# Altium PCB QCW Bridge PCBA.PcbDoc
Units mm, origin at the board's own origin, x right, y up, seen from the top; angles counter-clockwise.
Board outline 100 x 90 mm, 2 copper layers (Top Layer, Bottom Layer), stack 1.571 mm thick; 45 components, 17 nets, 129 pads, 228 vias.
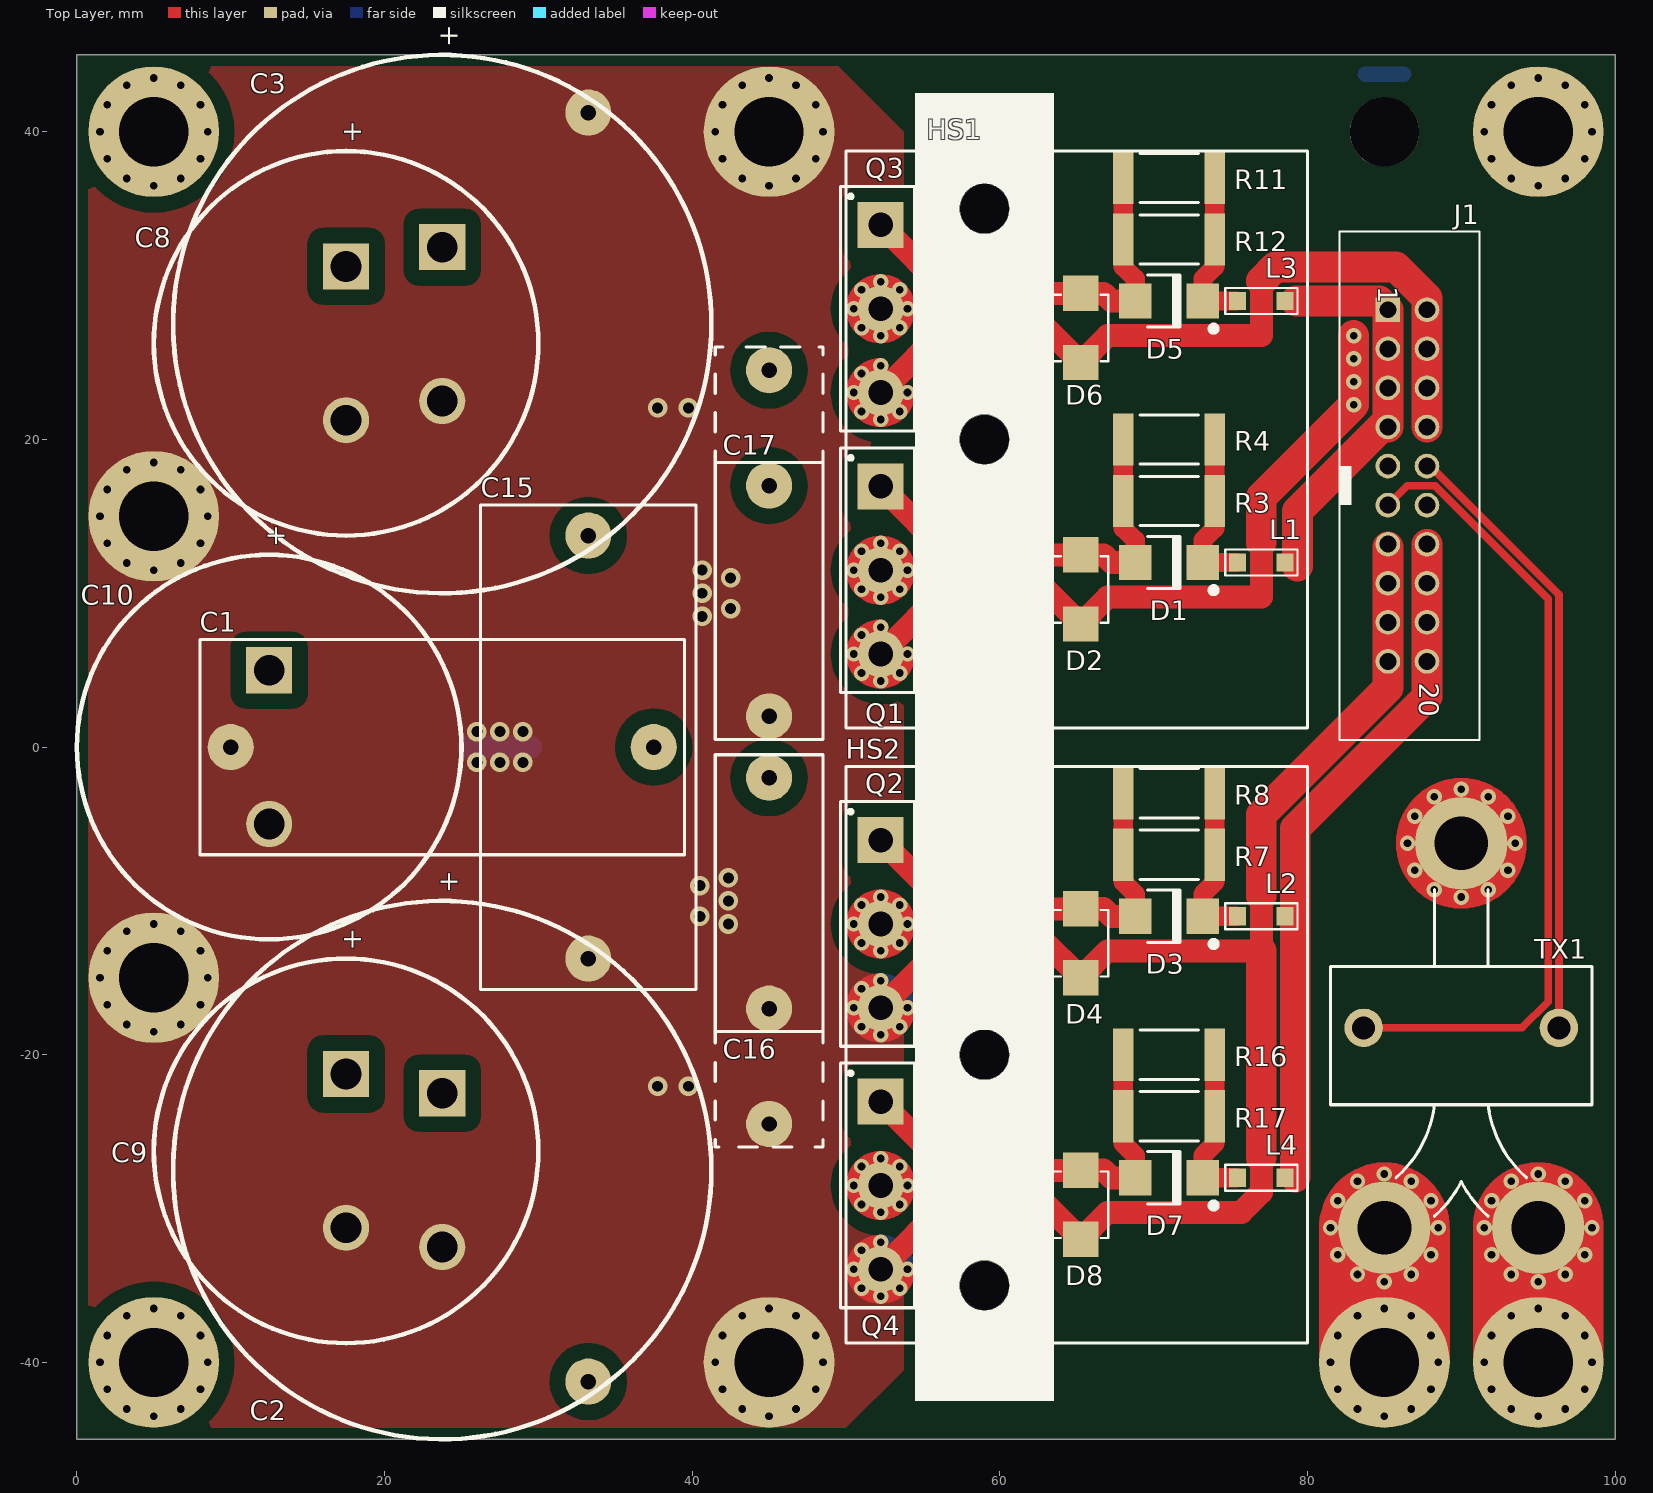
[diagram p0: Top Layer view]
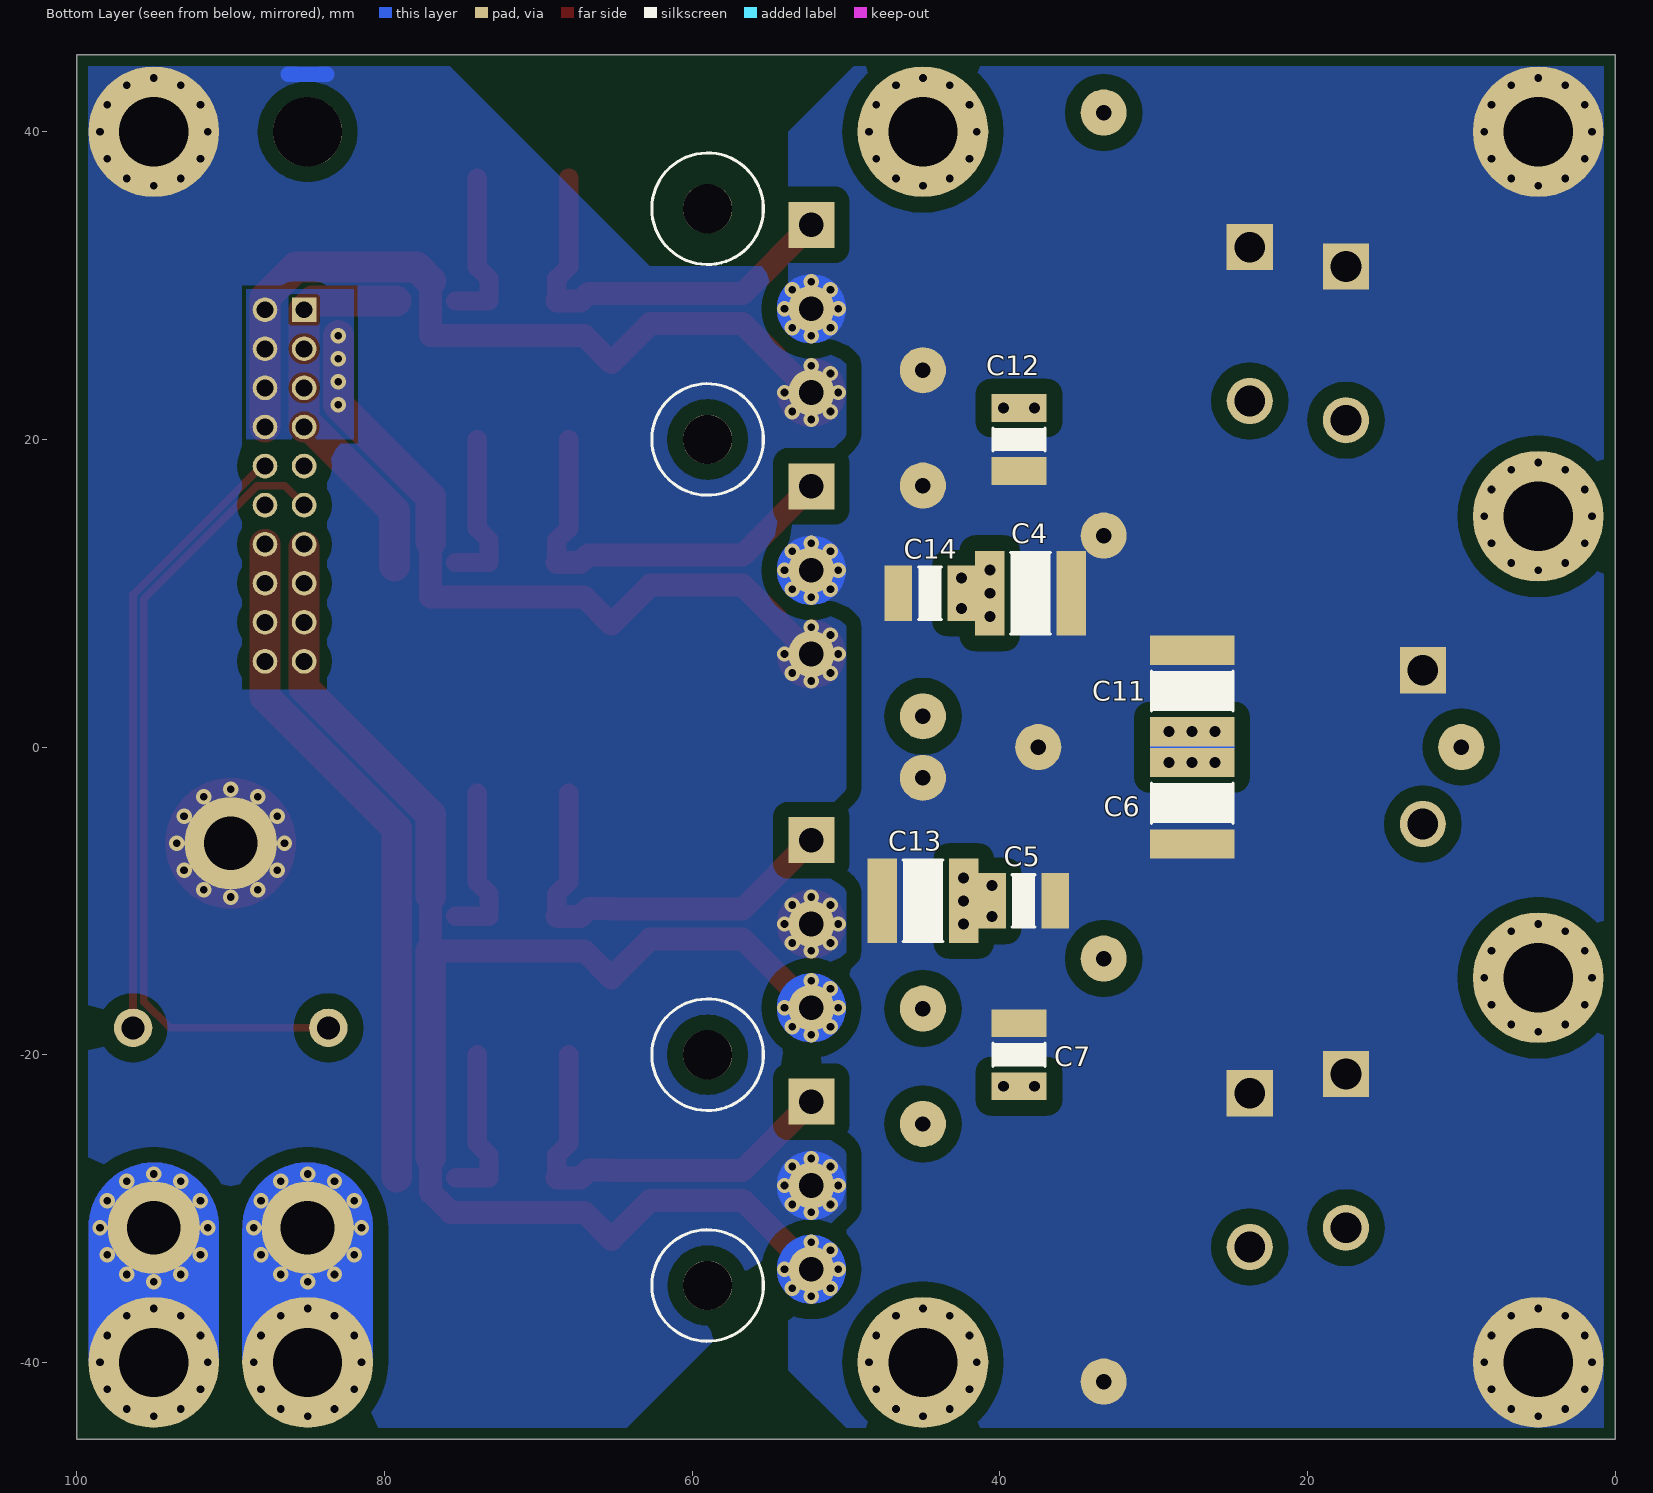
[diagram p1: Bottom Layer view, seen from below]

## Layer stack, top to bottom
Top Solder: solder mask 0.0102, Solder Resist, Dk 3.5
Top Layer: signal copper 0.0356
Dielectric 1: dielectric 1.5, FR-4, Dk 4.8
Bottom Layer: signal copper 0.0356
Bottom Solder: solder mask 0.0102, Solder Resist, Dk 3.5

## Board outline
0,-45 100,-45 100,45 0,45

## Design rules (kind name [scope] priority, off if disabled: settings)
Clearance Clearance_poly [InPolygon and not InNamedPolygon('E1C2_L02_P009')] p1: gap=1 ignorepadtopadclearanceinfootprint=FALSE
Clearance [All] p2: gap=0.203 ignorepadtopadclearanceinfootprint=FALSE
ComponentClearance [All] p1 off: gap=0.254 collisioncheckmode=3 verticalgap=0.254 showdistances=FALSE
Height [All] p1 off: minheight=0 maxheight=25.4 prefheight=12.7
HoleSize [All] p1: absolutevalues=TRUE maxlimit=6.3 minlimit=0.025 maxpercent=80.000 minpercent=20.000
PolygonConnect [All] p1: connectstyle=Direct reliefconductorwidth=0.254 reliefentries=4 polygonreliefangle="90 Angle" airgapwidth=0.254
RoutingVias [All] p1: holewidth=0.5 width=1 viastyle="Through Hole" minholewidth=0.5 minwidth=1 maxholewidth=0.5 maxwidth=1
SolderMaskExpansion [All] p1: expansion=0.102
Width [All] p1: maxlimit=10 minlimit=0.25 preferedwidth=0.5
27 further rules are at their usual default settings.

## Components (designator, comment, footprint, x,y, rotation, side; value= is the part's Value field where it differs from the comment)
C1 "B32774" "B32774 5uF 800V" 23.75,0 r180 top value="5uF 800V"
C2 "560uF" WCAP-AIL8_35x47 23.75,-27.5 r90 top locked
C3 "560uF" WCAP-AIL8_35x47 23.75,27.5 r90 top locked
C4 "Capacitor" 2220C 38,10 r0 bottom
C5 "Capacitor" 1812C 38.45,-10 r0 bottom
C6 "Capacitor" 2220C 27.5,-3.65 r90 bottom
C7 "Capacitor" 1812C 38.75,-20 r270 bottom
C8 "270uF" WCAP-AIL8_25x46 17.5,26.25 r90 top locked
C9 "270uF" WCAP-AIL8_25x46 17.5,-26.25 r90 top locked
C10 "270uF" WCAP-AIL8_25x46 12.5,0 r90 top locked
C11 "Capacitor" 2220C 27.5,3.65 r270 bottom
C12 "Capacitor" 1812C 38.75,20 r90 bottom
C13 "Capacitor" 2220C 45,-10 r180 bottom
C14 "Capacitor" 1812C 44.55,10 r180 bottom
C15 "B32774" "B32774 5uF 800V" 33.25,0 r270 top value="5uF 800V"
C16 "Capacitor" Cap_multi_footprint 45,-9.5 r270 top locked
C17 "Capacitor" Cap_multi_footprint 45,9.5 r90 top locked
D1 "60V 2A" DO-214AA_(SMB-J-BEND)_UNI 71,12 r180 top
D2 "600 W, 24 VDC" DO-214AA_Bidirectional 65.25,10.25 r270 top
D3 "60V 2A" DO-214AA_(SMB-J-BEND)_UNI 71,-11 r180 top
D4 "600 W, 24 VDC" DO-214AA_Bidirectional 65.25,-12.75 r270 top
D5 "60V 2A" DO-214AA_(SMB-J-BEND)_UNI 71,29 r180 top
D6 "600 W, 24 VDC" DO-214AA_Bidirectional 65.25,27.25 r270 top
D7 "60V 2A" DO-214AA_(SMB-J-BEND)_UNI 71,-28 r180 top
D8 "600 W, 24 VDC" DO-214AA_Bidirectional 65.25,-29.75 r270 top
HS1 "SK481_37.5mm HS" "SK 481 37.5" 55,20 r270 top locked
HS2 "SK481_37.5mm HS" "SK 481 37.5_FLIP" 55,-20 r270 top locked
J1 "61202021621" 61202021621 86.5,17 r270 top
L1 "32Ω" "WE-CBF_1206_High Speed" 77,12 r180 top value=32O
L2 "32Ω" "WE-CBF_1206_High Speed" 77,-11 r180 top value=32O
L3 "32Ω" "WE-CBF_1206_High Speed" 77,29 r180 top value=32O
L4 "32Ω" "WE-CBF_1206_High Speed" 77,-28 r180 top value=32O
Q1 "" TO-247 52.25,11.5 r270 top locked
Q2 "" TO-247 52.25,-11.5 r270 top locked
Q3 "" TO-247 52.25,28.5 r270 top locked
Q4 "" TO-247 52.25,-28.5 r270 top locked
R3 "Res2" RES_2512 71,16 r180 top value="5R6 1W"
R4 "Res2" RES_2512 71,20 r180 top value="5R6 1W"
R7 "Res2" RES_2512 71,-7 r180 top value="5R6 1W"
R8 "Res2" RES_2512 71,-3 r180 top value="5R6 1W"
R11 "Res2" RES_2512 71,37 r180 top value="5R6 1W"
R12 "Res2" RES_2512 71,33 r180 top value="5R6 1W"
R16 "Res2" RES_2512 71,-20 r180 top value="5R6 1W"
R17 "Res2" RES_2512 71,-24 r180 top value="5R6 1W"
TX1 "56050C 50:1 CT" KMP_5600_ALT 90,-18.75 r180 top locked

## Footprints (in the part's own frame and the unit in brackets; to place one, negate y for a bottom-side part, rotate by r counter-clockwise, add the part's x,y. Pads: shape width x height; smd on the part's side, far side on the other; paste and mask are expansions set on the pad)
1812C [mm] "Chip Capacitor, 2-Leads, Body 4.50x3.20mm, IPC Low Density"
  rect 1.8x3.6 smd: 1(-2.05,0) 2(2.05,0)
  silkscreen extent -0.75,-1.7 0.75,1.7, body extent -2.4,-1.75 2.4,1.75, height 2
2220C [mm] "Chip Capacitor, 2-Leads, Body 5.70x5.00mm, IPC Low Density"
  rect 1.9x5.5 smd: 1(-2.65,0) 2(2.65,0)
  silkscreen extent -1.3,-2.65 1.3,2.65, body extent -3.05,-2.7 3.05,2.7, height 2
61202021621 [mm] "20 pins, straight, gold plating"
  rect 1.6x1.6 hole 1.1: 1(-11.43,-1.27)
  round 1.6 hole 1.1: 2(-11.43,1.27) 3(-8.89,-1.27) 4(-8.89,1.27) 5(-6.35,-1.27) 6(-6.35,1.27) 7(-3.81,-1.27) 8(-3.81,1.27) 9(-1.27,-1.27) 10(-1.27,1.27) 11(1.27,-1.27) 12(1.27,1.27) 13(3.81,-1.27) 14(3.81,1.27) 15(6.35,-1.27) 16(6.35,1.27) 17(8.89,-1.27) 18(8.89,1.27) 19(11.43,-1.27) 20(11.43,1.27)
  silkscreen extent -16.53,-4.42 16.53,4.68, body extent -16.53,-4.42 16.53,4.75, height 9.13
"B32774 5uF 800V" [mm]
  round 3 hole 1: 1(-13.75,0) 2(13.75,0)
  silkscreen extent -15.75,-7 15.75,7, body extent -15.75,-7 15.75,7, height 24.5
Cap_multi_footprint [mm] "Multiple footprint capacitor"
  round 3 hole 1: 1(-7.5,0) 2(7.5,0) 2(15,0)
  silkscreen extent -9,-3.5 16.5,3.5, body extent -9,-2.5 9,2.5, height 10.5
DO-214AA_(SMB-J-BEND)_UNI [mm] "Surface Mount Diode"
  rect 2.1x2.3 smd: A(2.2,0) K(-2.2,0)
  silkscreen extent -3.04,-1.7 1.4,1.94, body extent -2.51,-1.97 2.52,1.97, height 2.44
DO-214AA_Bidirectional [mm] "WE-TVSP Power TVS Diode, DO-214AA, Bidirectional"
  rect 2.3x2.3 smd: 1(-2.25,0) 2(2.25,0)
  silkscreen extent -2.16,-1.81 2.16,1.81, body extent -2.7,-1.81 2.7,1.81, height 2.4
KMP_5600_ALT [mm] "Murata high frequency CT"
  round 2.5 hole 1.5: 1(-6.35,-0.5) 2(6.35,-0.5)
  round 6 hole 3.5: 3(5,12.5) 4(0,-12.5) 5(-5,12.5)
  silkscreen extent -8.5,-9.5 8.5,11.75, body extent -8.4,-4.47 8.4,4.45, height 20.23
RES_2512 [mm] "Chip Resistor 2512, 2-Leads, Body 6.40x3.20mm, IPC Medium Density"
  rect 1.35x3.4 smd: 1(-2.975,0) 2(2.975,0)
  silkscreen extent -1.9,-1.6 1.9,1.6, body extent -3.3,-1.7 3.3,1.7, height 0.7
"SK 481 37.5" [mm] "Fischer SK 481 Heatsink, 37.5mm wide"
  round 3.2 hole 3.2: 1(-15,4) 2(0,4)
  silkscreen extent -18.75,-5 18.75,25, body extent -18.75,-5 18.75,25, height 45.01
"SK 481 37.5_FLIP" [mm] "Fischer SK 481 Heatsink, 37.5mm wide"
  round 3.2 hole 3.2: 1(15,4) 2(0,4)
  silkscreen extent -18.75,-5 18.75,25, body extent -18.75,-5 18.75,25, height 45.01
TO-247 [mm] "SIP with Mounting Hole; 3 Leads; Body 20 x 15.6 x 5 mm (typ); Pitch 5.45 mm"
  rect 3x3 hole 1.6: 1(-5.45,0)
  round 3 hole 1.6: 2(0,0) 3(5.45,0)
  silkscreen extent -7.95,-2.6 7.95,2.7, body extent -8,-2.2 8,2.8, height 25.55
WCAP-AIL8_25x46 [mm] "Polarized capacitors, Aluminum Electrolytic Capacitors, 2-Leads, Body 25x46x10"
  rect 3x3 hole 2: 1(5,0)
  round 3 hole 2: 2(-5,0)
  silkscreen extent -12.5,-12.5 12.5,12.5, body extent -17.66,-17.64 17.59,17.62, height 46.09
WCAP-AIL8_35x47 [mm] "Polarized capacitors, Aluminum Electrolytic Capacitors, 2-Leads, Body 35x47x10"
  rect 3x3 hole 2: 1(5,0)
  round 3 hole 2: 2(-5,0)
  silkscreen extent -17.5,-17.5 17.5,17.5, body extent -24.73,-24.69 24.62,24.66, height 47.09
"WE-CBF_1206_High Speed" [mm] "SMD EMI Suppression Ferrite  Bead, body 3.2mmx1.6mm"
  rect 1.1x1.2 smd: 1(-1.55,0) 2(1.55,0)
  silkscreen extent -2.35,-0.85 2.35,0.85, body extent -1.6,-0.8 1.6,0.8, height 1.13

## Part data
C1 C15: library part Cap, "Capacitor", LatestRevisionDate=17-Jul-2002, LatestRevisionNote="Re-released for DXP Platform.", PackageDescription="Radial Cap, Thru-Hole; 2 Leads; 0.3 in Pin Spacing", PackageReference=RAD-0.3, Published=8-Jun-2000, Publisher="Altium Limited"
C2 C3: library part "WCAP-AIL8, 861101486027", "WCAP-AIL8 Aluminum Electrolytic Capacitors, 560uF", PartNumber=861101486027, RatedVoltage=450V, ComponentLink1Description=Manufacturer, ComponentLink1URL=http://www.we-online.de, ComponentLink2Description=Datasheet, ComponentLink2URL=http://katalog.we-online.com/pbs/datasheet/861101486027.pdf, PublishedDate="July 2016", Publisher="Wurth Elektronik", Size=35mmx47mm
C4 C6 C11 C13: Capacitance=0.22u, package=2220, voltage=630V
C5 C7 C12 C14: Capacitance=0.1u, package=1812, voltage=1kV
C8 C9 C10: library part "WCAP-AIL8, 861101484015", "WCAP-AIL8 Aluminum Electrolytic Capacitors, 270uF", PartNumber=861101484015, RatedVoltage=450V, ComponentLink1Description=Manufacturer, ComponentLink1URL=http://www.we-online.de, ComponentLink2Description=Datasheet, ComponentLink2URL=http://katalog.we-online.com/pbs/datasheet/861101484015.pdf, PublishedDate="July 2016", Publisher="Wurth Elektronik", Size=25mmx46mm
C16 C17: Capacitance=0.1u, voltage=630V
D1 D3 D5 D7: library part SS26, "SS26 Schottky rectifier"
D2 D4 D6 D8: library part "WE-TVSP DO-214AA, 824521241", "WE-TVSP Power TVS Diode, bidirectional, 600 W, 24 VDC", Manufacturer="Wurth Elektronik", partNo=824521241, ComponentLink1Description=Manufacturer, ComponentLink1URL=http://www.we-online.de, ComponentLink2Description=Datasheet, ComponentLink2URL=http://katalog.we-online.de/pbs/datasheet/824521241.pdf, Created by="Baojun Chen", Created Date=Nov.2015
HS1 HS2: library part SK_481_37.5
J1: "WR-BHD 2.54mm Male Box Header", Manufacturer="Wurth Elektronik", ComponentLink1 Description=Manufacturer, ComponentLink1URL=http://www.we-online.com, ComponentLink2 Description=Datasheet, ComponentLink2URL=http://katalog.we-online.de/em/datasheet/6120xx21621.pdf, Created by="Baojun Chen", Created Date="March 2016", NoPins=20, partNo=61202021621
L1 L2 L3 L4: library part "WE-CBF, 7427921", "WE-CBF SMD EMI Suppression Ferrite Bead, 1206, 32O", PartNumber=7427921, ComponentLink1Description=Manufacturer, ComponentLink1URL=http://www.we-online.de, ComponentLink2Description=Datasheet, ComponentLink2URL=http://katalog.we-online.de/pbs/datasheet/7427921.pdf, PublishedDate="Aug 2016", Publisher="Wurth Elektronik", Size=1206, Type="High Speed"
Q1 Q2 Q3 Q4: library part TO-247_IGBT_V, "IGBT, TO-247, Vertical"
R3 R4 R7 R8 R11 R12 R16 R17: "Resistor", LatestRevisionDate=17-Jul-2002, LatestRevisionNote="Re-released for DXP Platform.", PackageDescription="Axial Device, Thru-Hole; 2 Leads; 0.4 in Pin Spacing", PackageReference=AXIAL-0.4, Published=8-Jun-2000, Publisher="Altium Limited"
TX1: library part 56050C_ALT, "Murata 56050C 10A 50:1 CT"

## Free pads (board coordinates)
  round 8.5 hole 4.5: 0(5,-40) 0(5,-15) 0(5,15) 0(5,40) 0(45,-40) 0(45,40) 0(85,-40) 0(95,-40) 0(95,40)
  round 3 hole 1: 0(33.25,41.25) 0(33.25,-41.25)
  round 4.5 hole 4.5: 0(85,40)

## Via types
v1: diameter 1, hole 0.5, Top Layer to Bottom Layer, tented both sides, 112 vias
v2: diameter 1, hole 0.5, Top Layer to Bottom Layer, 96 vias
v3: diameter 1.27, hole 0.711, Top Layer to Bottom Layer, tented top, 20 vias

## Nets (pads, with @x,y where several pads share a name; then routed paths per layer and width w, separated by ;. In a path a pad name is that pad's centre, name@x,y a point inside that pad or via, vN(x,y) a via of type N, cw(c..) or ccw(c..) an arc to the next point about the centre after c; other vN are vias at no path point)
E1C2: D2.2 D6.2 J1.2 J1.4 J1.6 J1.8 pad.0@95,40 Q1.3 Q2.2 Q3.3 Q4.2 TX1.4 | length 183.5
  Top Layer w1: Q1.3@51.75,5.25 Q1.3@52.55,6.05 ; v1(52.25,7.8) ccw(c52.25,6.05) v1(51.013,4.813) ccw(c52.25,6.05) v1(54,6.05) ; v1(52.25,24.8) ccw(c52.25,23.05) v1(51.013,21.813) ccw(c52.25,23.05) v1(54,23.05) ; v1(50.5,-11.5) ccw(c52.25,-11.5) v1(54,-11.5) ccw(c52.25,-11.5) v1(50.5,-11.5) ; v1(54,-28.5) ccw(c52.25,-28.5) v1(54,-28.5)
  Top Layer w1.5: Q1.3 56.725,10.525 62.725,10.525 D2.2 67,9.75 77,9.75 77,13.302 ; Q3.3 56.725,27.525 62.725,27.525 D6.2 67,26.75 77,26.75 77,30.302 ; v1(93.5,-6.25) ccw(c90,-6.25) v1(93.5,-6.25)
  Top Layer w2: 77,13.302 77,16.25 v1(83,22.25) v1(83,23.75) v1(83,25.25) v1(83,26.75) ; 77,30.302 77.902,31.203 85.758,31.203 87.77,29.192 J1.2 J1.4 J1.6 J1.8
  Bottom Layer w1: v1(53.487,-29.737) cw(c52.25,-28.5) v1(53.487,-27.263) ; 83.75,43.75 86.25,43.75 ; J1.2@87.77,28.376 J1.2 ; v1(54,-28.5) ccw(c52.25,-28.5) v1(54,-28.5)
  other v1: 52.25,-30.25 51.013,-29.737 50.5,-28.5 51.013,-27.263 52.25,-26.75 52.25,-13.25 51.013,-12.737 53.487,-12.737 51.013,-10.263 53.487,-10.263 52.25,-9.75 90,-9.75 88.25,-9.281 91.75,-9.281 86.969,-8 93.031,-8 86.5,-6.25 86.969,-4.5 93.031,-4.5 88.25,-3.219 91.75,-3.219 90,-2.75 52.25,4.3 53.487,4.813 50.5,6.05 51.013,7.287 52.25,21.3 53.487,21.813 50.5,23.05 51.013,24.287
  other v2: 95,36.5 93.25,36.969 96.75,36.969 91.969,38.25 98.031,38.25 91.5,40 98.5,40 91.969,41.75 98.031,41.75 93.25,43.031 96.75,43.031 95,43.5
E1C2_OUT_1: pad.0@85,-40 TX1.3 | length 44
  Top Layer w1.5: v1@86.941,-34.162 ccw(c85,-31.25) v1(88.5,-31.25) ccw(c85,-31.25) v1@86.941,-34.162
  Bottom Layer w1.5: v1@86.941,-34.162 ccw(c85,-31.25) v1(88.5,-31.25) ccw(c85,-31.25) v1@86.941,-34.162
  other v1: 85,-34.75 83.25,-34.281 86.75,-34.281 81.969,-33 88.031,-33 81.5,-31.25 81.969,-29.5 88.031,-29.5 83.25,-28.219 86.75,-28.219 85,-27.75
  other v2: 85,-43.5 83.25,-43.031 86.75,-43.031 81.969,-41.75 88.031,-41.75 81.5,-40 88.5,-40 81.969,-38.25 88.031,-38.25 83.25,-36.969 86.75,-36.969 85,-36.5
E1C2_OUT_2: pad.0@95,-40 TX1.5 | length 44
  Top Layer w1.5: v1@96.941,-34.162 ccw(c95,-31.25) v1(98.5,-31.25) ccw(c95,-31.25) v1@96.941,-34.162
  Bottom Layer w1.5: v1@96.941,-34.162 ccw(c95,-31.25) v1(98.5,-31.25) ccw(c95,-31.25) v1@96.941,-34.162
  other v1: 95,-34.75 93.25,-34.281 96.75,-34.281 91.969,-33 98.031,-33 91.5,-31.25 91.969,-29.5 98.031,-29.5 93.25,-28.219 96.75,-28.219 95,-27.75
  other v2: 95,-43.5 93.25,-43.031 96.75,-43.031 91.969,-41.75 98.031,-41.75 91.5,-40 98.5,-40 91.969,-38.25 98.031,-38.25 93.25,-36.969 96.75,-36.969 95,-36.5
HIGH_G: J1.1 J1.3 J1.5 J1.7 L1.1 L3.1 | length 25.8
  Top Layer w2: 79.25,29 84.66,29 J1.1 J1.3 J1.5 J1.7@85.23,21.23 ; 79.35,11.75 79.35,15.35 J1.7@85.23,21.23 ; J1.7 J1.7@85.23,21.23
LOW_G: J1.14 J1.16 J1.18 J1.20 L2.1 L4.1 | length 44.7
  Top Layer w2: 79.203,-27.953 79.203,-5.297 87.77,3.27 J1.20 J1.18 J1.16 J1.14
NetD1_A: D1.A D2.1 Q1.1 R3.2 R4.2 | length 26.9
  Top Layer w1.25: R4.2 R3.2 68.025,14.225 68.8,13.45 D1.A
  Top Layer w1.5: Q1.1 56.725,12.475 D2.1@65.225,12.475 ; D2.1 66.75,12.5 67.25,12 D1.A
NetD1_K: D1.K L1.2 R3.1 R4.1 | length 10.5
  Top Layer w1.25: R4.1 R3.1 73.975,14.225 73.2,13.45 D1.K L1.2@75.375,12
NetD3_A: D3.A D4.1 Q2.1 R7.2 R8.2 | length 26.9
  Top Layer w1: Q2.1 Q2.1@52.3,-6.1
  Top Layer w1.25: R8.2 68.025,-8.775 68.8,-9.55 D3.A
  Top Layer w1.5: Q2.1@52.3,-6.1 56.725,-10.525 D4.1@65.225,-10.525 ; D4.1 66.75,-10.5 67.25,-11 D3.A
NetD3_K: D3.K L2.2 R7.1 R8.1 | length 10.5
  Top Layer w1.25: R8.1 73.975,-8.775 73.2,-9.55 D3.K L2.2@75.375,-11
NetD5_A: D5.A D6.1 Q3.1 R11.2 R12.2 | length 26.9
  Top Layer w1.25: R11.2 68.025,31.225 68.8,30.45 D5.A
  Top Layer w1.5: Q3.1 56.725,29.475 65.225,29.475 D6.1 66.75,29.5 67.25,29 D5.A
NetD5_K: D5.K L3.2 R11.1 R12.1 | length 10.5
  Top Layer w1.25: R11.1 73.975,31.225 73.2,30.45 D5.K L3.2@75.375,29
NetD7_A: D7.A D8.1 Q4.1 R16.2 R17.2 | length 26.9
  Top Layer w1.25: R16.2 68.025,-25.775 68.8,-26.55 D7.A
  Top Layer w1.5: Q4.1 56.725,-27.525 D8.1@65.225,-27.525 ; D8.1 66.75,-27.5 67.25,-28 D7.A
NetD7_K: D7.K L4.2 R16.1 R17.1 | length 10.5
  Top Layer w1.25: R16.1 73.975,-25.775 73.2,-26.55 D7.K L4.2@75.375,-28
NetJ1_10: J1.10 TX1.1 | length 40.2
  Top Layer w0.5: J1.10 87.997,18.27 96.35,9.917 TX1.1
NetJ1_11: J1.11 TX1.2 | length 52.7
  Top Layer w0.5: TX1.2@83.9,-18.5 84.15,-18.25 93.941,-18.25 95.647,-16.545 95.647,9.625 88.289,16.983 86.483,16.983 J1.11
VBus+: C1.1 C2.1 C3.1 C4.1 C5.1 C6.1 C7.1 C8.1 C9.1 C10.1 C11.1 C12.1 C13.1 C14.1 C15.1 C16.1 C17.2 pad.0@5,40 pad.0@5,-40 pad.0@33.25,-41.25 Q1.2 Q3.2 | length 52.2
  Top Layer w1: v1(53.487,27.263) cw(c52.25,28.5) v1(53.487,29.737) ; v1(54,11.5) ccw(c52.25,11.5) v1(54,11.5) ; v1(54,28.5) ccw(c52.25,28.5) v1(54,28.5)
  Bottom Layer w1: v1(54,11.5) ccw(c52.25,11.5) v1(54,11.5) ; v1(54,28.5) ccw(c52.25,28.5) v1(54,28.5)
  other v1: 5,-43.5 3.25,-43.031 6.75,-43.031 1.969,-41.75 8.031,-41.75 1.5,-40 8.5,-40 1.969,-38.25 8.031,-38.25 3.25,-36.969 6.75,-36.969 5,-36.5 52.25,9.75 51.013,10.263 53.487,10.263 50.5,11.5 51.013,12.737 53.487,12.737 52.25,13.25 52.25,26.75 51.013,27.263 50.5,28.5 51.013,29.737 52.25,30.25
  other v2: 5,36.5 3.25,36.969 6.75,36.969 1.969,38.25 8.031,38.25 1.5,40 8.5,40 1.969,41.75 8.031,41.75 3.25,43.031 6.75,43.031 5,43.5
VBus-: C1.2 C2.2 C3.2 C4.2 C5.2 C6.2 C7.2 C8.2 C9.2 C10.2 C11.2 C12.2 C13.2 C14.2 C15.2 C16.2 C17.1 D4.2 D8.2 J1.13 J1.15 J1.17 J1.19 pad.0@5,15 pad.0@5,-15 pad.0@33.25,41.25 pad.0@45,40 pad.0@45,-40 Q2.3 Q4.3 | length 161.6
  Top Layer w1: v1(52.25,-32.2) ccw(c52.25,-33.95) v1(54,-33.95) ; v1(52.25,-15.2) ccw(c52.25,-16.95) v1(54,-16.95)
  Top Layer w1.5: Q4.3 56.725,-29.475 62.725,-29.475 D8.2 67,-30.25 75.698,-30.25 77,-28.948 77,-26.698 ; Q2.3 56.725,-12.475 62.725,-12.475 D4.2 67,-13.25 77,-13.25 77,-9.698
  Top Layer w2: 77,-26.698 77,-13.25 ; 77,-9.698 77,-4.384 85.23,3.846 J1.19 J1.17 J1.15 J1.13@85.23,13
  Bottom Layer w1: v1(51.013,-35.187) ccw(c52.25,-33.95) v1(51.013,-32.713) ; v1(51.013,-18.187) ccw(c52.25,-16.95) v1(51.013,-15.713) ; v1(54,-33.95) ccw(c52.25,-33.95) v1(54,-33.95) ; v1(54,-16.95) ccw(c52.25,-16.95) v1(54,-16.95)
  Bottom Layer w1.5: 25.5,0 29.5,0
  other v1: 52.25,-35.7 53.487,-35.187 50.5,-33.95 52.25,-18.7 53.487,-18.187 50.5,-16.95
  other v2: 45,-43.5 43.25,-43.031 46.75,-43.031 41.969,-41.75 48.031,-41.75 41.5,-40 48.5,-40 41.969,-38.25 48.031,-38.25 43.25,-36.969 46.75,-36.969 45,-36.5 5,-18.5 3.25,-18.031 6.75,-18.031 1.969,-16.75 8.031,-16.75 1.5,-15 8.5,-15 1.969,-13.25 8.031,-13.25 3.25,-11.969 6.75,-11.969 5,-11.5 5,11.5 3.25,11.969 6.75,11.969 1.969,13.25 8.031,13.25 1.5,15 8.5,15 1.969,16.75 8.031,16.75 3.25,18.031 6.75,18.031 5,18.5 45,36.5 43.25,36.969 46.75,36.969 41.969,38.25 48.031,38.25 41.5,40 48.5,40 41.969,41.75 48.031,41.75 43.25,43.031 46.75,43.031 45,43.5
  other v3: 37.75,-22.05 39.75,-22.05 42.35,-11.5 40.5,-11 42.35,-10 40.5,-9 42.35,-8.5 26,-1 27.5,-1 29,-1 26,1 27.5,1 29,1 40.65,8.5 42.5,9 40.65,10 42.5,11 40.65,11.5 37.75,22.05 39.75,22.05
pads on no net: HS1.1 HS1.2 HS2.1 HS2.2 J1.9 J1.12

## Polygon pours and split planes (outlines as drawn)
VBus+ on Bottom Layer "VBUS+_L02_P011" (solid, remove dead copper, pour order 11): 0.75,44.25 49.5,44.25 53.75,40 53.75,-40.5 50,-44.25 0.75,-44.25
E1C2 on Bottom Layer "E1C2_L02_P008" (solid, remove dead copper, pour order 8): 50,31.25 62.75,31.25 75.75,44.25 99.25,44.25 99.25,-44.25 64.25,-44.25 50,-30
E1C2 on Bottom Layer "E1C2_L02_P009" (solid, pour order 9): 82,29.75 82,27.75 82,20 89,20 89,29.75
no net on Top Overlay "HS_Insulation" (solid): 54.5,42.5 54.5,-42.5 63.5,-42.5 63.5,42.5
VBus- on Top Layer "VBUS-_L01_P013" (solid, remove dead copper, pour order 13): 0.75,44.25 49.5,44.25 53.75,40 53.75,-40.5 50,-44.25 0.75,-44.25

## Other copper
Top Layer:
  rectangle net E1C2_OUT_1: 80.75,-40 89.25,-31.25
  rectangle net E1C2_OUT_2: 90.75,-40 99.25,-31.25
  pour cut-out: 52.25,-14.766 52.25,-16.95 53.75,-18.45 53.75,-14.256
  pour cut-out: 52.25,-31.76 52.25,-33.944 53.75,-35.444 53.75,-31.25
Bottom Layer:
  rectangle net E1C2_OUT_1: 80.75,-40 89.25,-31.25
  rectangle net E1C2_OUT_2: 90.75,-40 99.25,-31.25
  pour cut-out: 89.25,30 81.76,30 81.76,28 81.75,27.99 81.75,19.75 83.75,19.75 83.75,3.75 89.25,3.75 89.25,30 89,29.75 89,4 84,4 84,20 82,20 82,27.75 82,29.75 89,29.75

## Silkscreen, mask and mechanical layers (free items; w line width, h text height)
Top Overlay:
  circle w0.254: c59,-35 r1.75
  circle w0.254: c59,-20 r1.75
  circle w0.254: c59,20 r1.75
  circle w0.254: c59,35 r1.75
  pour cut-out: 57.25,-35 ccw(c59,-35) 59,-36.75 ccw(c59,-35) 60.75,-35 ccw(c59,-35) 59,-33.25 ccw(c59,-35)
  pour cut-out: 57.25,-20 ccw(c59,-20) 59,-21.75 ccw(c59,-20) 60.75,-20 ccw(c59,-20) 59,-18.25 ccw(c59,-20)
  pour cut-out: 57.25,20 ccw(c59,20) 59,18.25 ccw(c59,20) 60.75,20 ccw(c59,20) 59,21.75 ccw(c59,20)
  pour cut-out: 57.25,35 ccw(c59,35) 59,33.25 ccw(c59,35) 60.75,35 ccw(c59,35) 59,36.75 ccw(c59,35)
Bottom Overlay:
  region: 45.3,8.3 45.3,11.7 43.8,11.7 43.8,8.3
  region: 39.2,-11.7 39.2,-8.3 37.7,-8.3 37.7,-11.7
  region: 30.15,-4.95 30.15,-2.35 24.85,-2.35 24.85,-4.95
  region: 30.15,2.35 30.15,4.95 24.85,4.95 24.85,2.35
  rectangle: 37.05,19.25 40.45,20.75
  rectangle: 36.7,7.35 39.3,12.65
  rectangle: 43.7,-12.65 46.3,-7.35
  rectangle: 37.05,-20.75 40.45,-19.25
Board Outline:
  the board outline again, w0.1

## Text inside footprints (layer, text, board x,y; h text height)
C2: Top Overlay "+" at 24.75,-9.5 h1.27 r90
C3: Top Overlay "+" at 24.75,45.5 h1.27 r90
C8: Top Overlay "+" at 18.5,39.25 h1.27 r90
C9: Top Overlay "+" at 18.5,-13.25 h1.27 r90
C10: Top Overlay "+" at 13.5,13 h1.27 r90
J1: Top Overlay "20" at 87.262,4.173 h1.27 r270; Top Overlay "1" at 84.595,29.954 h1.27 r270